# Altium PCB W5500_V1.PcbDoc
Units mm, origin at the board's own origin, x right, y up, seen from the top; angles counter-clockwise.
Board outline 70 x 50 mm, 2 copper layers (Top Layer, Bottom Layer), stack 1.536 mm thick; 73 components, 52 nets, 281 pads, 175 vias.
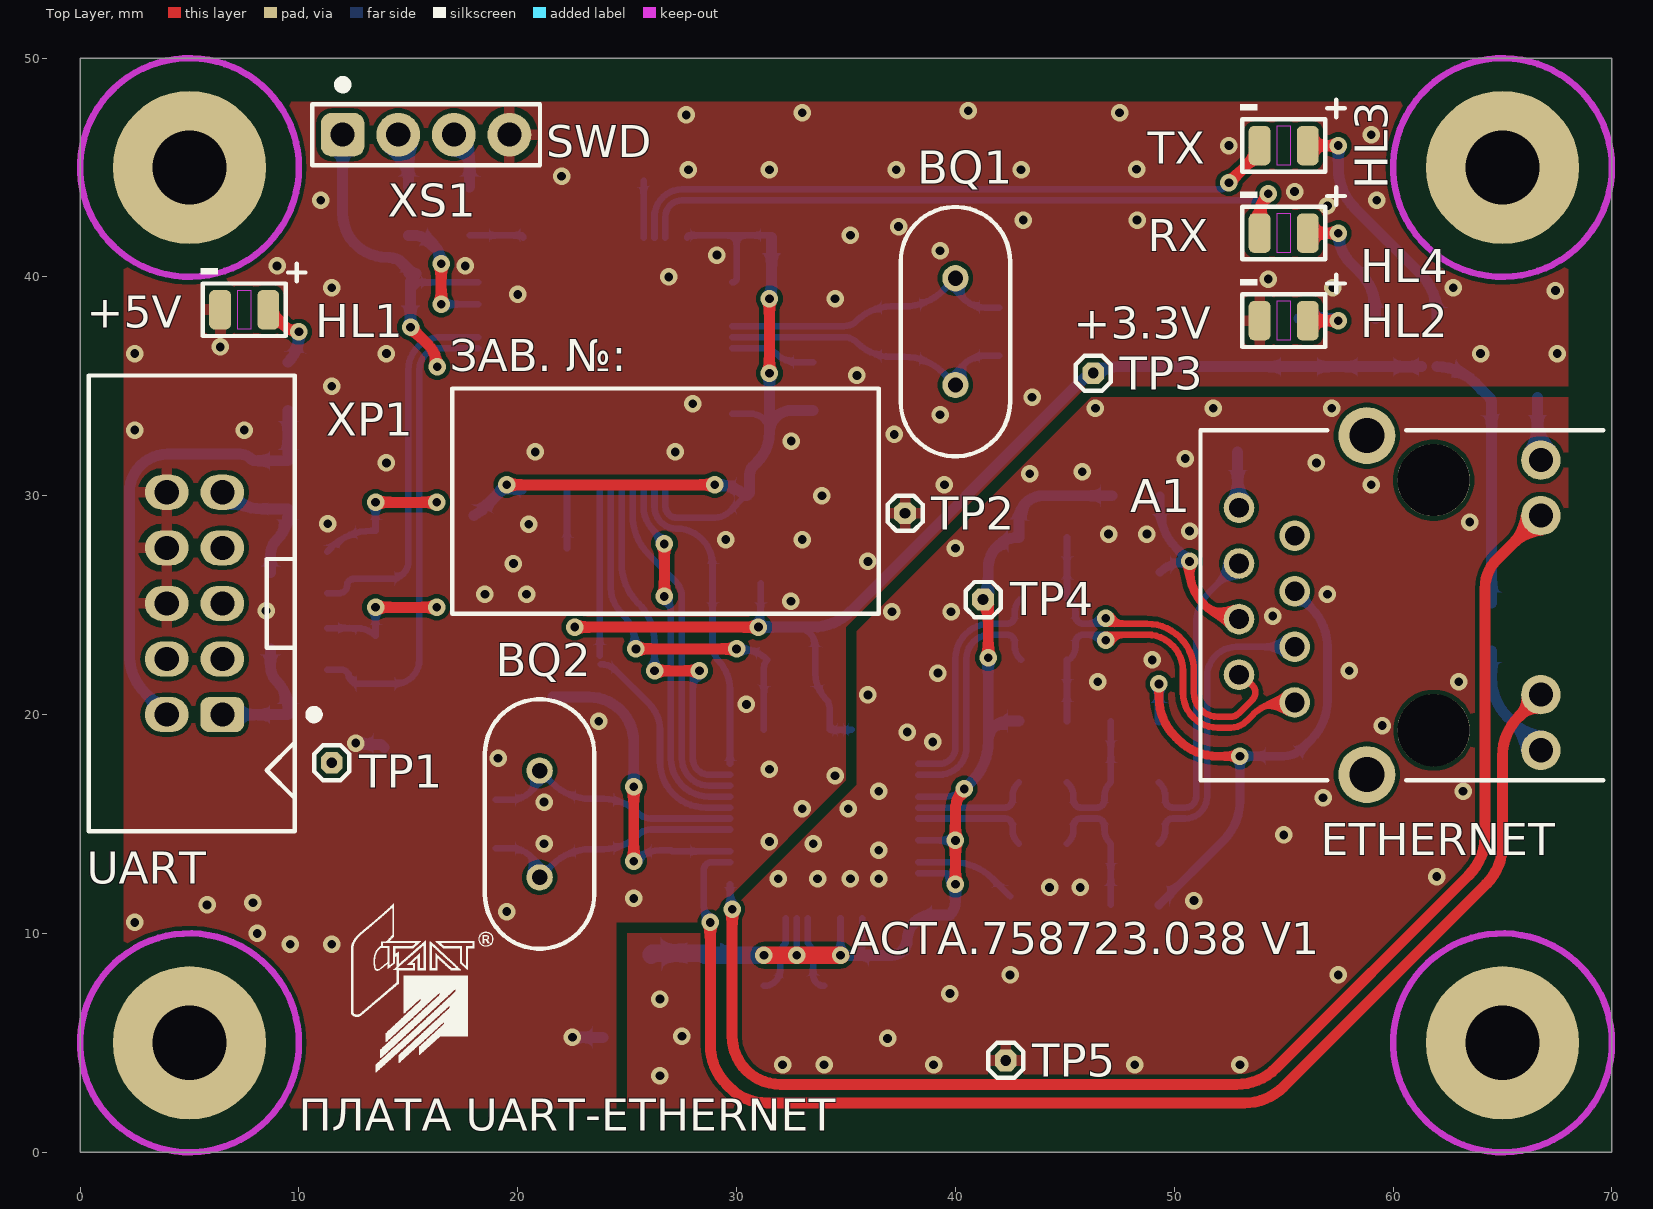
[diagram p0: Top Layer view]
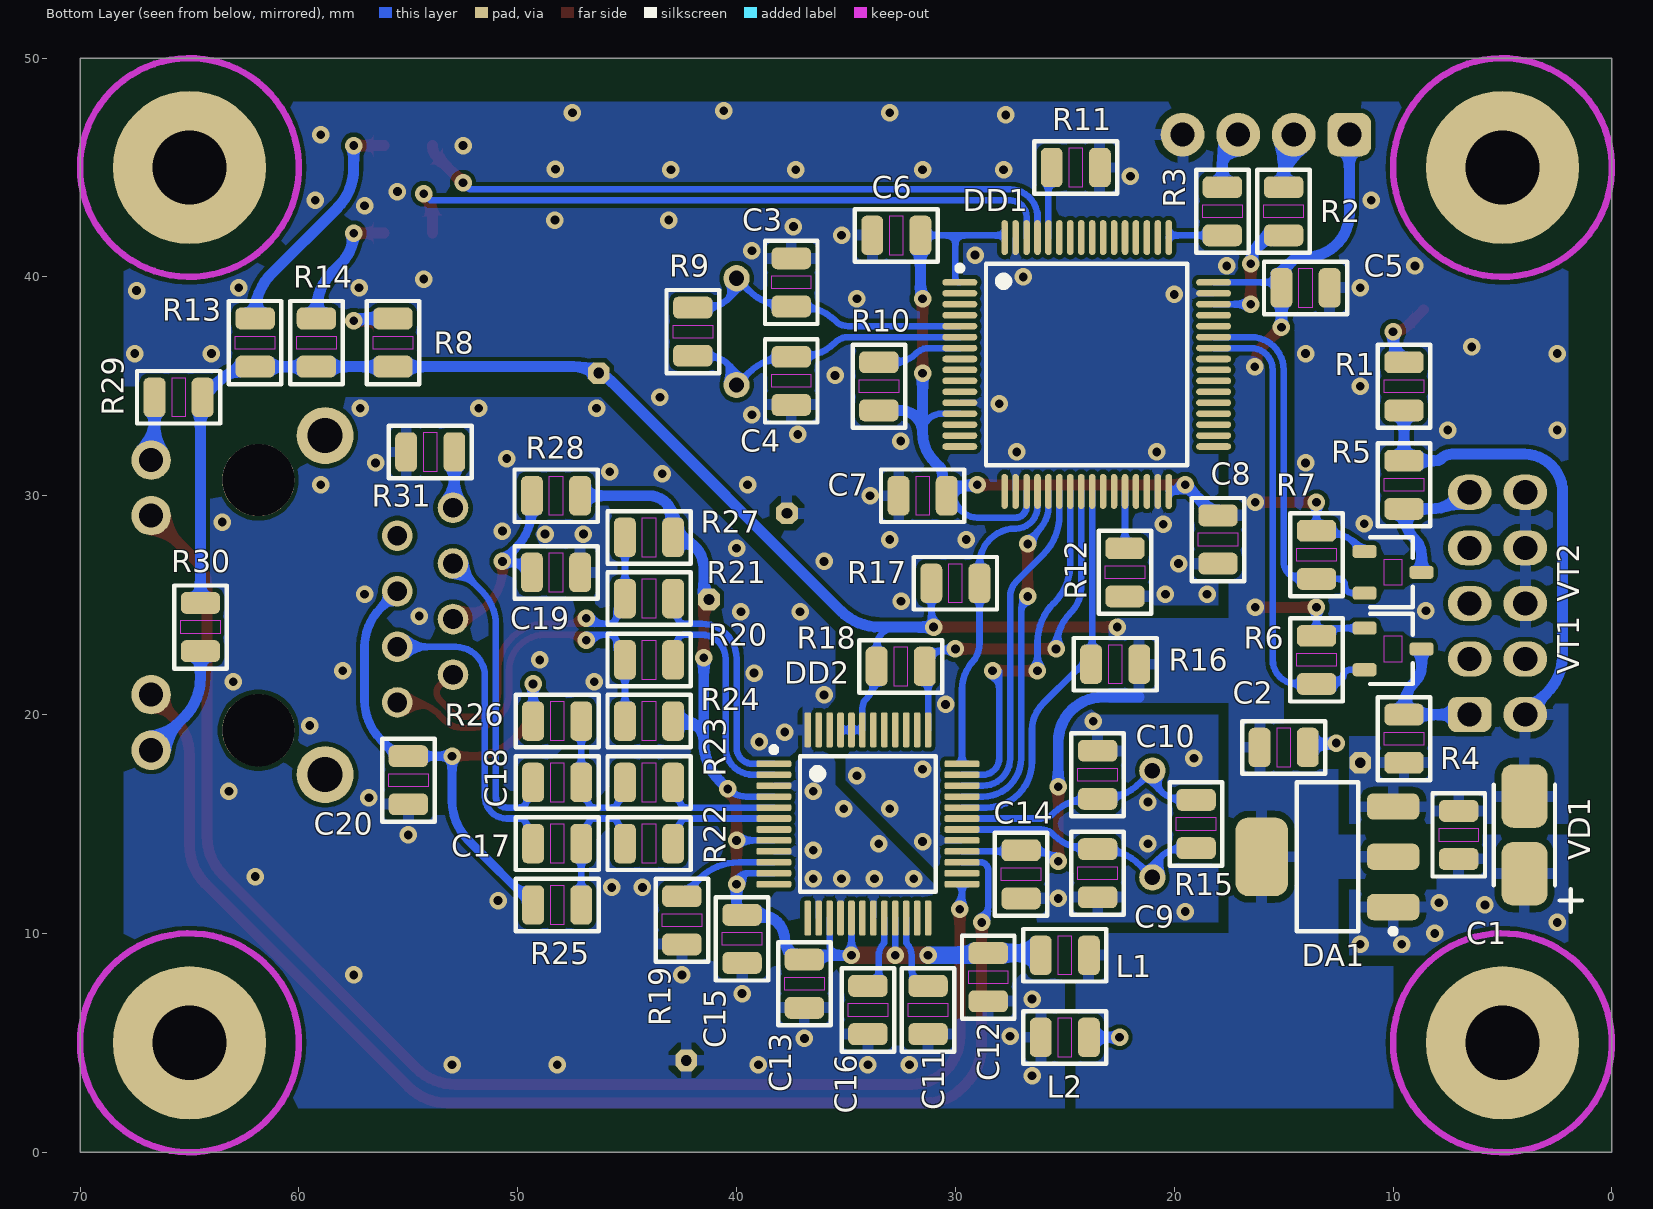
[diagram p1: Bottom Layer view, seen from below]

## Layer stack, top to bottom
Top Solder: solder mask 0.01, Solder Resist, Dk 3.5
Top Layer: signal copper 0.018
Dielectric 1: core 1.5, FR4 Tg135, Dk 4.5
Bottom Layer: signal copper 0.018
Bottom Solder: solder mask 0.01, Solder Resist, Dk 3.5

## Board outline
0,0 0,50 70,50 70,0

## Design rules (kind name [scope] priority, off if disabled: settings)
Clearance [All] p1: gap=0.2 ignorepadtopadclearanceinfootprint=FALSE
ComponentClearance [All] p1: gap=0.1 collisioncheckmode=3 verticalgap=0.1 showdistances=FALSE
DiffPairsRouting [All] p1: maxlimit=1 minlimit=0.2 mostfreqgap=0.2 toplayer_minwidth=0.2 toplayer_maxwidth=1 toplayer_prefwidth=0.2 bottomlayer_minwidth=0.2 bottomlayer_maxwidth=1 bottomlayer_prefwidth=0.2 maxuncoupledlength=12.7
Height [All] p1: minheight=0 maxheight=50 prefheight=15
HoleSize [All] p1: absolutevalues=TRUE maxlimit=3.4 minlimit=0.4 maxpercent=80.000 minpercent=20.000
HoleToHoleClearance [All] p1: gap=0.3 allowstackedmicrovias=TRUE
MinimumSolderMaskSliver [All] p1: minsoldermaskwidth=0.1
PasteMaskExpansion [All] p1: expansion=0.05
PlaneConnect [All] p1: planeconnectstyle=Relief reliefexpansion=0.3 reliefentries=4 reliefconductorwidth=0.3 reliefairgap=0.2
PolygonConnect PolygonConnect_testpoint [InComponent('TP1')] p1: connectstyle=Direct reliefconductorwidth=0.254 reliefentries=4 polygonreliefangle="90 Angle" airgapwidth=0.254
PolygonConnect PolygonConnect_via [isVia] p2: connectstyle=Direct reliefconductorwidth=0.254 reliefentries=4 polygonreliefangle="90 Angle" airgapwidth=0.254
PolygonConnect [All] p3: connectstyle=Relief reliefconductorwidth=0.5 reliefentries=4 polygonreliefangle="90 Angle" airgapwidth=0.3
RoutingCorners [All] p1: cornerstyle=Round minsetback=0.5 maxsetback=2.5
RoutingVias [All] p1: holewidth=0.4 width=0.8 viastyle="Through Hole" minholewidth=0.4 minwidth=0.8 maxholewidth=0.5 maxwidth=1
SilkToSilkClearance [All] p1: silktosilkclearance=0.1
SilkToSolderMaskClearance [IsPad] p1: minsilkscreentomaskgap=0.1 clearancetoexposedcopper=TRUE
SolderMaskExpansion SolderMaskExpansion_via [isVia] p1: expansion=-0.6 istentingtop=FALSE
SolderMaskExpansion [All] p2: expansion=0.1 istentingtop=FALSE
Width [All] p1: maxlimit=5 minlimit=0.2 preferedwidth=0.5
19 further rules are at their usual default settings.

## Classes and differential pairs
net class ETHERNET: RDI_N RDI_P RX_N RX_P TD_N TD_P TX_N TX_P
differential pair TX: +TX_P -TX_N
differential pair TD: +TD_P -TD_N
differential pair RX: +RX_P -RX_N
differential pair RDI: +RDI_P -RDI_N

## Components (designator, comment, footprint, x,y, rotation, side; value= is the part's Value field where it differs from the comment)
A1 "HR911105A" HR911105A 55.5,25 r180 top locked
BQ1 "HT-49S_Rated" HT-49S 40,37.5 r270 top value=14.7456MHz
BQ2 "HT-49S_Rated" HT-49S 21,15 r90 top value=25MHz
C1 "CAP0805_Rated" CAP0805 7,14.5 r270 bottom value=4.7uF
C2 "CAP0805_Rated" CAP0805 15,18.5 r180 bottom value=4.7uF
C3 "CAP0805_Rated" CAP0805 37.5,39.75 r270 bottom value=18pF
C4 "CAP0805_Rated" CAP0805 37.5,35.25 r90 bottom value=18pF
C5 "CAP0805_Rated" CAP0805 14,39.5 r180 bottom value=0.1uF
C6 "CAP0805_Rated" CAP0805 32.7,41.9 r0 bottom value=0.1uF
C7 "CAP0805_Rated" CAP0805 31.5,30 r0 bottom value=0.1uF
C8 "CAP0805_Rated" CAP0805 18,28 r270 bottom value=0.1uF
C9 "CAP0805_Rated" CAP0805 23.5,12.75 r90 bottom value=18pF
C10 "CAP0805_Rated" CAP0805 23.5,17.25 r270 bottom value=18pF
C11 "CAP0805_Rated" CAP0805 31.25,6.5 r270 bottom value=0.01uF
C12 "CAP0805_Rated" CAP0805 28.5,8 r270 bottom value=0.1uF
C13 "CAP0805_Rated" CAP0805 36.9,7.7 r270 bottom value=0.1uF
C14 "CAP0805_Rated" CAP0805 27,12.7 r270 bottom value=0.1uF
C15 "CAP0805_Rated" CAP0805 39.75,9.75 r270 bottom value=0.1uF
C16 "CAP0805_Rated" CAP0805 34,6.5 r270 bottom value=4.7uF
C17 "CAP0805_Rated" CAP0805 48.2,14.1 r0 bottom value=6800pF
C18 "CAP0805_Rated" CAP0805 48.2,16.9 r0 bottom value=6800pF
C19 "CAP0805_Rated" CAP0805 48.25,26.5 r180 bottom value=0.022uF
C20 "CAP0805_Rated" CAP0805 55,17 r270 bottom value=0.01uF
DA1 "AMS1117-3.3" SOT-223 13,13.5 r0 bottom
DD1 "STM32F103RB" LQFP-64 24,36 r180 bottom
DD2 "W5500" LQFP-48 34,15 r180 bottom
HL1 "KPT-2012SGC" KPT-2012 7.5,38.5 r0 top
HL2 "KPT-2012SGC" KPT-2012 55,38 r0 top
HL3 "KPT-2012SGC" KPT-2012 55,46 r0 top
HL4 "KPT-2012SGC" KPT-2012 55,42 r0 top
L1 "BLM21BD121SN1D" IND0805 25,9 r0 bottom value="120 Ohm"
L2 "BLM21BD121SN1D" IND0805 25,5.25 r0 bottom value="120 Ohm"
R1 "RES0805_Rated" RES0805 9.5,35 r270 bottom value=3k
R2 "RES0805_Rated" RES0805 15,43 r270 bottom value=33
R3 "RES0805_Rated" RES0805 17.8,43 r270 bottom value=33
R4 "RES0805_Rated" RES0805 9.5,18.9 r270 bottom value=10k
R5 "RES0805_Rated" RES0805 9.5,30.5 r90 bottom value=10k
R6 "RES0805_Rated" RES0805 13.5,22.5 r90 bottom value=10k
R7 "RES0805_Rated" RES0805 13.5,27.3 r90 bottom value=10k
R8 "RES0805_Rated" RES0805 55.7,37 r270 bottom value=1k
R9 "RES0805_Rated" RES0805 42,37.5 r90 bottom value=1M
R10 "RES0805_Rated" RES0805 33.5,35 r90 bottom value=10k
R11 "RES0805_Rated" RES0805 24.5,45 r0 bottom value=10k
R12 "RES0805_Rated" RES0805 22.25,26.5 r90 bottom value=10k
R13 "RES0805_Rated" RES0805 62,37 r270 bottom value=1k
R14 "RES0805_Rated" RES0805 59.2,37 r270 bottom value=1k
R15 "RES0805_Rated" RES0805 19,15 r270 bottom value=1M
R16 "RES0805_Rated" RES0805 22.7,22.3 r180 bottom value=10k
R17 "RES0805_Rated" RES0805 30,26 r0 bottom value=10k
R18 "RES0805_Rated" RES0805 32.5,22.2 r0 bottom value=10k
R19 "RES0805_Rated" RES0805 42.5,10.6 r90 bottom value="11.4k 1%"
R20 "RES0805_Rated" RES0805 44,22.5 r0 bottom value=33
R21 "RES0805_Rated" RES0805 44,25.3 r0 bottom value=33
R22 "RES0805_Rated" RES0805 44,14.1 r0 bottom value=33
R23 "RES0805_Rated" RES0805 44,16.9 r0 bottom value=33
R24 "RES0805_Rated" RES0805 44,19.7 r180 bottom value="49.9 1%"
R25 "RES0805_Rated" RES0805 48.2,11.3 r180 bottom value="49.9 1%"
R26 "RES0805_Rated" RES0805 48.2,19.7 r0 bottom value="49.9 1%"
R27 "RES0805_Rated" RES0805 44,28.1 r180 bottom value="49.9 1%"
R28 "RES0805_Rated" RES0805 48.25,30 r180 bottom value="10 1%"
R29 "RES0805_Rated" RES0805 65.5,34.5 r180 bottom value=2.2k
R30 "RES0805_Rated" RES0805 64.5,24 r90 bottom value=2.2k
R31 "RES0805_Rated" RES0805 54,32 r180 bottom value=0
TP1 "TestPad" PAD-TH-OCT1x1-0.5 11.5,17.8 r0 top
TP2 "TestPad" PAD-TH-OCT1x1-0.5 37.7,29.2 r90 top
TP3 "TestPad" PAD-TH-OCT1x1-0.5 46.3,35.6 r90 top
TP4 "TestPad" PAD-TH-OCT1x1-0.5 41.268,25.256 r90 top
TP5 "TestPad" PAD-TH-OCT1x1-0.5 42.3,4.2 r90 top
VD1 "SMAJ5.0A" "SMA (DO-214AC)" 4,14.5 r270 bottom
VT1 "BSS138" SOT-23 10,23 r180 bottom
VT2 "BSS138" SOT-23 10,26.5 r180 bottom
XP1 "IDC-10MS" "IDC-10MS pad1.6x2.0" 6.5,20 r90 top
XS1 "PBS-4" PBS-4 12,46.5 r0 top

## Footprints (in the part's own frame and the unit in brackets; to place one, negate y for a bottom-side part, rotate by r counter-clockwise, add the part's x,y. Pads: shape width x height; smd on the part's side, far side on the other; paste and mask are expansions set on the pad)
CAP0805 [mm] "Chip Capacitor, 2-Leads, Body 2,00x1,25mm, IPC Low Density"
  rrect50% 1x1.8 smd: 1(-1.1,0) 2(1.1,0)
  Top Layer keep-out region: -0.3,0.9 0.3,0.9 0.3,-0.9 -0.3,-0.9
  silkscreen extent -1.9,-1.2 1.9,1.2, body extent -1,-0.62 1,0.63, height 1
HR911105A [mm] "Ethernet Connector 10/100 1x1 Tab Down RJ45 w/mag G/Y LED"
  round 3.3 hole 3.3: 0(-6.35,5.715) 0(-6.35,-5.715)
  round 2.6 hole 1.6: 0(-3.3,7.745) 0(-3.3,-7.745)
  round 1.4 hole 0.9: 1(0,4.445) 2(2.54,3.175) 3(0,1.905) 4(2.54,0.635) 5(0,-0.635) 6(2.54,-1.905) 7(0,-3.175) 8(2.54,-4.445)
  round 1.8 hole 1.1: 9(-11.25,6.63) 10(-11.25,4.09) 11(-11.25,-4.09) 12(-11.25,-6.63)
  silkscreen extent -14.1,-8 4.3,8, body extent -17.27,-7.94 4.13,7.94, height 13.7
HT-49S [mm] "TH Crystal"
  round 1.2 hole 0.7: 1(-2.44,0) 2(2.44,0)
  silkscreen extent -5.7,-2.5 5.7,2.5, body extent -5.48,-2.25 5.5,2.25, height 3.7
"IDC-10MS pad1.6x2.0" [mm] "Box Header Pitch 2.54mm"
  rrect50% 1.6x2 hole 1.1: 1(0,0)
  oval 1.6x2 hole 1.1: 2(0,2.54) 3(2.54,0) 4(2.54,2.54) 5(5.08,0) 6(5.08,2.54) 7(7.62,0) 8(7.62,2.54) 9(10.16,0) 10(10.16,2.54)
  silkscreen extent -5.33,-4.39 15.49,6.1, body extent -5.07,-3.01 15.23,5.84, height 9.33
IND0805 [mm] "Chip Inductor, 2-Leads, Body 2,00x1,25mm, IPC Low Density"
  rrect50% 1x1.8 smd: 1(-1.1,0) 2(1.1,0)
  Top Layer keep-out region: -0.3,0.9 0.3,0.9 0.3,-0.9 -0.3,-0.9
  silkscreen extent -1.9,-1.2 1.9,1.2, body extent -1,-0.62 1,0.63, height 0.85
KPT-2012 [mm] "2.0x1.2mm SMD LED"
  rrect50% 1x1.8 smd: A(1.1,0) K(-1.1,0)
  Top Layer keep-out region: -0.3,0.9 0.3,0.9 0.3,-0.9 -0.3,-0.9
  silkscreen extent -2,-1.2 2.8,2.1, body extent -1,-0.63 1,0.63, height 0.7
LQFP-48 [mm] "LQFP, 48-Leads, Body 7,00x7,00mm, Pitch 0,50mm, IPC Low Density"
  rrect50% 1.6x0.3 smd: 1(-4.3,2.75) 2(-4.3,2.25) 3(-4.3,1.75) 4(-4.3,1.25) 5(-4.3,0.75) 6(-4.3,0.25) 7(-4.3,-0.25) 8(-4.3,-0.75) 9(-4.3,-1.25) 10(-4.3,-1.75) 11(-4.3,-2.25) 12(-4.3,-2.75) 25(4.3,-2.75) 26(4.3,-2.25) 27(4.3,-1.75) 28(4.3,-1.25) 29(4.3,-0.75) 30(4.3,-0.25) 31(4.3,0.25) 32(4.3,0.75) 33(4.3,1.25) 34(4.3,1.75) 35(4.3,2.25) 36(4.3,2.75)
  rrect50% 0.3x1.6 smd: 13(-2.75,-4.3) 14(-2.25,-4.3) 15(-1.75,-4.3) 16(-1.25,-4.3) 17(-0.75,-4.3) 18(-0.25,-4.3) 19(0.25,-4.3) 20(0.75,-4.3) 21(1.25,-4.3) 22(1.75,-4.3) 23(2.25,-4.3) 24(2.75,-4.3) 37(2.75,4.3) 38(2.25,4.3) 39(1.75,4.3) 40(1.25,4.3) 41(0.75,4.3) 42(0.25,4.3) 43(-0.25,4.3) 44(-0.75,4.3) 45(-1.25,4.3) 46(-1.75,4.3) 47(-2.25,4.3) 48(-2.75,4.3)
  silkscreen extent -4.43,-3.1 3.1,3.52, body extent -4.57,-4.57 4.57,4.57, height 1.62
LQFP-64 [mm] "LQFP, 64-Leads, Body 10,00x10,00mm, Pitch 0,50mm, IPC Low Density"
  oval 1.6x0.3 smd: 1(-5.8,3.75) 2(-5.8,3.25) 3(-5.8,2.75) 4(-5.8,2.25) 5(-5.8,1.75) 6(-5.8,1.25) 7(-5.8,0.75) 8(-5.8,0.25) 9(-5.8,-0.25) 10(-5.8,-0.75) 11(-5.8,-1.25) 12(-5.8,-1.75) 13(-5.8,-2.25) 14(-5.8,-2.75) 15(-5.8,-3.25) 16(-5.8,-3.75) 33(5.8,-3.75) 34(5.8,-3.25) 35(5.8,-2.75) 36(5.8,-2.25) 37(5.8,-1.75) 38(5.8,-1.25) 39(5.8,-0.75) 40(5.8,-0.25) 41(5.8,0.25) 42(5.8,0.75) 43(5.8,1.25) 44(5.8,1.75) 45(5.8,2.25) 46(5.8,2.75) 47(5.8,3.25) 48(5.8,3.75)
  oval 0.3x1.6 smd: 17(-3.75,-5.8) 18(-3.25,-5.8) 19(-2.75,-5.8) 20(-2.25,-5.8) 21(-1.75,-5.8) 22(-1.25,-5.8) 23(-0.75,-5.8) 24(-0.25,-5.8) 25(0.25,-5.8) 26(0.75,-5.8) 27(1.25,-5.8) 28(1.75,-5.8) 29(2.25,-5.8) 30(2.75,-5.8) 31(3.25,-5.8) 32(3.75,-5.8) 49(3.75,5.8) 50(3.25,5.8) 51(2.75,5.8) 52(2.25,5.8) 53(1.75,5.8) 54(1.25,5.8) 55(0.75,5.8) 56(0.25,5.8) 57(-0.25,5.8) 58(-0.75,5.8) 59(-1.25,5.8) 60(-1.75,5.8) 61(-2.25,5.8) 62(-2.75,5.8) 63(-3.25,5.8) 64(-3.75,5.8)
  silkscreen extent -5.93,-4.6 4.6,4.6, body extent -6.07,-6.07 6.07,6.07, height 1.62
PAD-TH-OCT1x1-0.5 [mm] "PAD TH 1x1mm Octogonal Hole 0.5mm"
  oct 1x1 hole 0.5: 1(0,0)
  silkscreen extent -0.8,-0.8 0.8,0.8
PBS-4 [mm] "Female Header Pitch 2.54mm"
  rrect50% 2x2 hole 1.1: 1(0,0)
  round 2 hole 1.1: 2(2.54,0) 3(5.08,0) 4(7.62,0)
  silkscreen extent -1.4,-1.4 9.02,2.49, body extent -1.27,-1.27 8.89,1.27, height 8.4
RES0805 [mm] "Chip Resistor, 2-Leads, Body 2,00x1,25mm, IPC Low Density"
  rrect50% 1x1.8 smd: 1(-1.1,0) 2(1.1,0)
  Top Layer keep-out region: -0.3,0.9 0.3,0.9 0.3,-0.9 -0.3,-0.9
  silkscreen extent -1.9,-1.2 1.9,1.2, body extent -1,-0.62 1,0.63, height 0.47
"SMA (DO-214AC)" [mm] "Molded Diode, 2-Leads, Body 4,30x2,40mm, IPC Low Density"
  rrect50% 2.9x2.1 smd: A(1.778,0) K(-1.778,0)
  silkscreen extent -2.3,-1.4 3.5,2.63, body extent -2.79,-1.47 2.81,1.48, height 2.9
SOT-23 [mm] "3-Leads, Body 2,90x2,45mm, Pitch 0,95mm, IPC Low Density"
  rrect50% 1.1x0.6 smd: 1(-1.3,0.95) 2(-1.3,-0.95) 3(1.3,0)
  Top Layer keep-out region: -0.4,0.6 0.4,0.6 0.4,-0.6 -0.4,-0.6
  silkscreen extent -1.05,-1.6 0.9,1.6, body extent -1.3,-1.48 1.3,1.52, height 1.1
SOT-223 [mm] "SOT223, 4-Leads, Body 6,50x7,00mm (avg), Pitch 2,30mm, IPC Low Density"
  rrect50% 2.4x1.2 smd: 1(-3,2.3) 2(-3,0) 3(-3,-2.3)
  rrect50% 2.4x3.6 smd: 2(3,0)
  silkscreen extent -3.12,-3.4 1.4,3.52, body extent -3.48,-3.25 3.48,3.25, height 1.7

## Part data
A1: "Ethernet Connector 10/100 1x1 Tab Down RJ45 w/mag G/Y LED"
C1 C2 C3 C4 C5 C6 C7 C8 C9 C10 C11 C12 C13 C14 C15 C16 C17 C18 C19 C20: Case=0805, ComponentLink1Description=DatasheetLink
DA1: "Fixed Voltage 3.3V 1A Low Dropout Voltage Regulator"
DD1: "ARM Cortex-M3 MCU"
DD2: "Ethernet ICs 3in1 Enet Controller TCP/IP +MAC+PHY"
HL1 HL2 HL3 HL4: "2.0x1.2mm SMD LED Super Bright Green"
L1 L2: "Ferrite Bead 0805 120 Ohm", Case=0805, DCResistance="0.25 Ohm", Manufacturer=Murata, RatedCurrent=200mA, Tolerance=25%, 1Carticle=42076, 1Ccode=М00053470, 1CfullName="BLM21BD121SN1D MUR", 1Cgroup=01010901, 1Cname="BLM21BD121SN1D MUR", ComponentLink1Description=DatasheetLink, Name="Фильтр BLM21BD121SN1D", PartNumber=BLM21BD121SN1D
R1 R2 R3 R4 R5 R6 R7 R8 R9 R10 R11 R12 R13 R14 R15 R16 R17 R18 R19 R20 R21 R22 R23 R24 R25 R26 R27 R28 R29 R30 R31: Tolerance=5%
TP1 TP2 TP3 TP4 TP5: "TestPoint on PCB", Label="\"Label\""
VD1: "5Vr 400W 43.5A UniDirectional TVS", Vbr=6.4V
VT1 VT2: "Small Signal N-Channel MOSFET 50V 220mA", Case=SOT-23, 1Carticle=30894, 1Ccode=М00041810, 1CfullName="Транзистор BSS138", 1Cgroup=01010104, 1Cname="Транзистор BSS138", ChannelPolarity=N-Channel, ComponentLink1Description=DatasheetLink, Name="Транзистор BSS138", PartNumber=BSS138
XP1: "Box Header Pitch 2.54mm", Circuit1=RX, Circuit2=+5V, Circuit3=NC, Circuit4=NC, Circuit5=TXE, Circuit6=GND, Circuit7=MX, Circuit8=GND, Circuit9=TX, Circuit10=GND, Label="\"Label\""
XS1: "Female Header Pitch 2.54mm", Circuit1=+3.3V, Circuit2=SWDIO, Circuit3=SWCLK, Circuit4=GND, ComponentLink1Description=DatasheetLink, Label="\"SWD\""
BQ1 BQ2: ComponentLink1Description=DatasheetLink

## Free pads (board coordinates)
  round 7 hole 3.4: 0(5,5) 0(5,45) 0(65,5) 0(65,45)

## Via types
v1: diameter 0.8, hole 0.4, Top Layer to Bottom Layer, 175 vias

## Nets (pads, with @x,y where several pads share a name; then routed paths per layer and width w, separated by ;. In a path a pad name is that pad's centre, name@x,y a point inside that pad or via, vN(x,y) a via of type N, cw(c..) or ccw(c..) an arc to the next point about the centre after c; other vN are vias at no path point)
1.2V: C11.1 DD2.22 | length 3.6
  Bottom Layer w0.3: C11.1 ccw(c31.25,8.35) 32,8.35 32,9 cw(c32.75,9) 32.22,9.53 ccw(c31.95,9.662) 32.25,9.661 DD2.22
3.3V: C2.1 C5.1 C6.1 C7.1 C8.1 C14.1 DA1.2 DD1.1 DD1.13 DD1.19 DD1.32 DD1.48 DD1.64 DD2.28 DD2.43 DD2.44 DD2.45 L1.1 R6.2 R7.2 R8.2 R10.1 R13.2 R14.2 R16.2 R17.2 R18.2 R29.2 R30.2 TP3.1 VT1.1 VT2.1 XS1.1 | length 150.8
  Top Layer w0.5: v1(13.5,24.9) v1(16.3,24.9) ; v1(13.5,29.7) v1(16.3,29.7) ; v1(15.1,37.7) 15.919,36.881 cw(c14.938,35.9) 16.268,36.295 cw(c14.938,35.9) v1(16.325,35.9) ; v1(19.5,30.5) v1(29,30.5) ; v1(22.6,24) v1(31,24) ; v1(25.3,13.3) v1(25.3,16.7) ; v1(31.5,35.6) v1(31.5,39)
  Bottom Layer w0.3: VT1.1 12.655,23.95 cw(c12.655,22.755) R6.2 v1(13.5,24.9) ; VT2.1 11.506,27.656 cw(c13.302,25.86) 13.302,28.4 R7.2 v1(13.5,29.7) ; C5.1@15.35,39.75 DD1.48 ; v1@19.483,30.2 DD1.32 ; v1(25.3,13.3) cw(c26.507,12.093) 26.507,13.8 C14.1 ccw(c27.121,13.921) 27.121,13.75 DD2.28 ; DD1.19 26.75,29.5 ccw(c27.25,29.5) 27.25,29 29,29 ccw(c29,29.966) 29.683,29.283 C7.1 ; DD1.64 cw(c27.85,41.8) 27.85,41.9 30,41.9 ; DD1.13 30.628,33.75 cw(c30.628,32.878) 31.5,32.878 ; DD1.1 ccw(c29.8,39.95) 30,39.95 30,41.9 ; R17.2 v1@31.1,24.241 ; C6.1@31.6,41.8 ccw(c31.5,41.8) 31.5,41.9 30,41.9 ; 32.7,24 cw(c32.7,23.1) 33.6,23.1 R18.2 33.6,21.863 ccw(c35.202,21.863) 33.888,20.947 ccw(c35.202,21.863) 34.069,20.731 cw(c33.632,20.294) 34.25,20.294 DD2.43 DD2.44 DD2.45 ; v1@31.1,24.241 cw(c30.759,24.241) v1(31,24) ccw(c31,24.1) 31.1,24.1 v1@31.1,24.241
  Bottom Layer w0.5: XS1.1 12,42.9 ccw(c14,42.9) 14,40.9 cw(c14,39.8) 14.298,40.859 ccw(c14.431,41.341) 14.36,40.846 cw(c14.3,40.4) 14.62,40.716 ccw(c14.974,41.069) 14.669,40.673 cw(c14,39.8) 15.041,40.154 ccw(c15.467,40.302) 15.043,40.15 15.35,40.15 15.1,39.8 C5.1 ; v1(15.1,37.7) C5.1 ; C5.1@15.35,39.75 C5.1 ; C8.1 18.393,29.35 18.393,29.393 v1(19.5,30.5) ; 21.6,20.8 23.251,20.8 cw(c23.251,18.751) 24.7,20.2 cw(c23.251,18.751) 25.3,18.751 v1(25.3,16.7) ; v1(29,30.5) 29.193,30.5 cw(c29.193,28.793) C7.1 ccw(c30.4,30.2) 30.6,30.2 30.6,30.993 cw(c31.1,30.993) 30.746,31.346 30.95,31.55 ccw(c29.622,32.878) 31.5,32.878 ; v1(31,24) 32.7,24 33.448,24 ccw(c33.448,26.54) 35.244,24.744 45.656,35.156 cw(c47.452,33.36) 47.452,35.9 R8.2 R13.2@61.3,35.9 ; v1(31.5,35.6) 31.5,34.626 31.5,32.878 ; v1(31.5,39) ccw(c31.5,39.1) 31.6,39.1 C6.1@31.6,41.8 ; R10.1 32.522,33.9 ccw(c32.522,32.878) 31.5,32.878 ; R13.2 cw(c62,33.486) 63.707,35.193 R29.2 cw(c64.159,34.259) 64.5,34.259 R30.2
3.3VA: C12.1 C13.1 C15.1 DD2.4 DD2.8 DD2.11 DD2.15 DD2.17 DD2.21 L1.2 R24.2 R27.2 R28.2 TP4.1 | length 52
  Top Layer w0.5: v1(40,12.25) v1(40,14.25) 40,15.634 cw(c41.366,15.634) v1(40.4,16.6) ; v1(41.5,22.6) TP4.1@41.5,25
  Top Layer w0.8: v1(31.25,9) v1(32.75,9) v1(34.75,9)
  Bottom Layer w0.3: v1(32.75,9) DD2.21 ; v1(34.75,9) DD2.17 ; 35.3,9 ccw(c35.3,9.45) 35.75,9.45 DD2.15 ; DD2.11 39.5,12.75 cw(c39.5,12.25) v1(40,12.25) ; DD2.8 v1(40,14.25) ; DD2.4 39.555,16.25 ccw(c39.555,17.445) 40.001,16.336 ccw(c39.555,17.445) v1(40.4,16.6)
  Bottom Layer w0.5: v1(34.75,9) 35.3,9 37.1,9 ccw(c37.1,9.7) 37.8,9.7 cw(c38.95,9.7) 38.95,10.85 C15.1 ccw(c39.146,11.454) 40,11.454 v1(40,12.25) ; v1(40.4,16.6) 40.756,16.956 ccw(c38.96,18.752) 41.5,18.752 41.5,18.8 ; v1(41.5,22.6) 41.5,18.8 ; TP4.1@41.5,25.228 41.5,26.7 cw(c42.9,26.7) R27.2 42.9,28.9 cw(c44,28.9) 44,30 R28.2 ; R24.2 42.4,19.7 ccw(c42.4,18.8) 41.5,18.8
  Bottom Layer w0.8: L1.2 cw(c26.2,9) 26.2,9.1 C12.1 ccw(c28.6,9.1) 28.6,9 v1(31.25,9)
5V: C1.1 DA1.3 R1.2 R4.2 R5.2 TP1.1 VD1.K XP1.2 | length 21.4
  Bottom Layer w0.5: XP1.2 2.994,20.966 cw(c4.79,22.762) 2.25,22.762 2.25,30.15 cw(c4,30.15) 4,31.9 7.317,31.9 cw(c7.317,31.217) 7.8,31.7 ccw(c8.041,31.941) 8.041,31.6 R5.2 R1.2
ACTLED: A1.10 DD2.27 | length 59.9
  Top Layer w0.5: v1(28.8,10.5) 28.8,4.899 ccw(c31.34,4.899) 29.544,3.103 29.92,2.727 ccw(c31.402,4.79) 31.402,2.25 53.198,2.25 ccw(c53.198,4.79) 54.994,2.994 64.256,12.256 ccw(c62.46,14.052) 65,14.052 65,18.108 cw(c67.54,18.108) 65.744,19.904 A1.10
  Bottom Layer w0.3: v1(28.8,10.5) cw(c29.524,11.224) 28.5,11.224 28.5,12.9 cw(c28.85,12.9) 28.85,13.25 DD2.27
BOOT0: DD1.60 R11.2 | length 2.6
  Bottom Layer w0.3: DD1.60 R11.2@25.75,44.4
BOOT1: DD1.28 R12.2 | length 2.6
  Bottom Layer w0.3: R12.2 DD1.28
EXRES: DD2.10 R19.2 | length 4.7
  Bottom Layer w0.3: DD2.10 39.898,13.25 cw(c39.898,10.71) 41.694,12.506 R19.2
GND: C1.2 C2.2 C3.1 C4.1 C5.2 C6.2 C7.2 C8.2 C9.1 C10.1 C14.2 DA1.1 DD1.12 DD1.18 DD1.31 DD1.47 DD1.63 DD2.29 HL1.K HL2.K L2.1 R11.1 R12.1 TP2.1 VD1.A XP1.6 XP1.8 XP1.10 XS1.4 | length 2.8
  Bottom Layer w0.5: v1(12.6,18.7) 12.657,18.643 13.757,18.643 C2.2 ; v1(22.5,5.25) L2.1
  other v1: 9.6,9.5 11.5,9.5 8.1,10 2.5,10.5 19.5,11 5.8,11.3 7.9,11.4 25.3,11.6 21.2,14.1 31.5,14.2 33,15.7 21.2,16 34.5,17.2 31.5,17.5 19.1,18 23.7,19.7 30.452,20.461 8.5,24.75 32.486,25.176 18.5,25.5 20.4,25.5 19.8,26.9 36,27 29.5,28 33,28 20.5,28.7 11.316,28.722 33.9,30 39.5,30.5 14,31.5 20.8,32 27.2,32 32.5,32.5 37.2,32.8 2.5,33 7.5,33 39.3,33.7 28,34.2 43.5,34.5 11.5,35 35.5,35.5 2.5,36.5 14,36.5 64,36.5 67.5,36.5 6.4,36.8 34.5,39 20,39.2 67.417,39.377 11.5,39.5 57.25,39.5 62.75,39.5 54.3,39.9 26.9,40 9,40.5 17.6,40.5 29.1,41 39.3,41.2 35.2,41.9 37.4,42.3 43.1,42.6 48.3,42.6 57,43.25 11,43.5 59.25,43.5 55.5,43.9 22,44.6 27.8,44.9 31.5,44.9 37.3,44.9 43,44.9 48.28,44.921 52.5,46 59,46.5 27.7,47.4 33,47.5 47.5,47.5 40.583,47.597
GNDA: C11.2 C12.2 C13.2 C15.2 C16.2 C19.2 C20.2 DD2.3 DD2.9 DD2.14 DD2.16 DD2.19 DD2.48 L2.2 R19.1 R31.1 TP5.1
  other v1: 26.5,3.5 32.1,4 34,4 39,4 48.2,4 53,4 36.9,5.2 27.5,5.3 26.5,7 39.75,7.25 42.5,8.1 57.5,8.1 50.9,11.5 44.3,12.1 45.7,12.1 31.9,12.5 33.7,12.5 35.2,12.5 36.5,12.5 62,12.6 36.5,13.8 33.5,14.1 55,14.5 35.1,15.7 56.8,16.2 36.5,16.5 63.2,16.5 38.96,18.752 37.8,19.2 59.5,19.5 36,20.9 46.5,21.5 63,21.5 39.2,21.9 58,22 49,22.5 54.5,24.5 37.1,24.7 39.8,24.7 57,25.5 40,27.6 47,28.25 48.75,28.25 50.702,28.386 63.5,28.8 59,30.5 43.4,31 45.8,31.1 56.5,31.5 50.5,31.7 51.777,33.997 46.4,34 57.2,34
LED-RX: DD1.62 HL4.K | length 31
  Top Layer w0.5: HL4.K 53.9,42.834 cw(c55.266,42.834) v1(54.3,43.8)
  Bottom Layer w0.3: DD1.62 26.75,42.75 cw(c27.5,42.75) 27.5,43.5 29.5,43.5 54,43.5 v1(54.3,43.8)
LED-TX: DD1.61 HL3.K | length 30.3
  Top Layer w0.5: v1(52.5,44.3) 53.688,45.488 ccw(c53.176,46) HL3.K
  Bottom Layer w0.3: DD1.61 26.25,42.913 ccw(c25.977,43.037) 26.271,42.981 cw(c27.5,42.75) 27.5,44 27.999,44 ; 28,44 52.2,44 v1(52.5,44.3)
LINKLED: A1.11 DD2.25 | length 63.3
  Top Layer w0.5: v1(29.8,11.1) 29.8,5.3 ccw(c32,5.3) 32,3.1 52.848,3.1 ccw(c52.848,5.64) 54.644,3.844 63.456,12.656 ccw(c61.66,14.452) 64.2,14.452 64.2,25.771 cw(c66.057,25.771) 64.744,27.084 A1.11
  Bottom Layer w0.3: DD2.25 29.7,11.341 ccw(c30.041,11.341) v1(29.8,11.1)
NetA1_8: A1.8 R31.2 | length 2.6
  Bottom Layer w0.5: R31.2 52.9,29.505 A1.8
NetA1_9: A1.9 R30.1 | length 5.4
  Bottom Layer w0.5: R30.1 64.5,21.672 ccw(c67.04,21.672) 65.244,19.876 A1.9
NetA1_12: A1.12 R29.1 | length 3
  Bottom Layer w0.5: R29.1 66.6,31.78 ccw(c66.75,31.78) A1.12
NetC16_1: C16.1 DD2.20 | length 3.4
  Bottom Layer w0.3: DD2.20 33.25,9.75 33.25,9.662 ccw(c33.55,9.662) 33.28,9.53 cw(c32.75,9) 33.5,9 33.5,8.5 33.5,8.1 ccw(c34,8.1) 33.541,7.901 ccw(c34,8.1) 33.801,7.641 ccw(c34,8.1) C16.1
NetHL1_A: HL1.A R1.1 | length 3.3
  Top Layer w0.5: HL1.A 9.317,37.783 ccw(c10,38.466) v1(10,37.5)
  Bottom Layer w0.5: R1.1 ccw(c8.293,37.307) 10,37.307 v1(10,37.5)
NetHL2_A: HL2.A R8.1 | length 3.2
  Top Layer w0.5: HL2.A v1(57.5,38)
  Bottom Layer w0.5: R8.1 57.259,38.1 cw(c57.259,37.759) v1(57.5,38)
NetHL3_A: HL3.A R13.1 | length 10.9
  Top Layer w0.5: HL3.A v1(57.5,46)
  Bottom Layer w0.5: v1(57.5,46) 57.5,44.952 ccw(c60.04,44.952) 58.244,43.156 61.256,40.144 cw(c59.46,38.348) 62,38.348 R13.1
NetHL4_A: HL4.A R14.1 | length 5.8
  Top Layer w0.5: HL4.A v1(57.5,42)
  Bottom Layer w0.5: v1(57.5,42) ccw(c59.431,42) 58.066,40.634 58.456,40.244 cw(c56.66,38.448) 59.2,38.448 R14.1
NetR2_1: R2.1 XS1.2 | length 2.7
  Bottom Layer w0.5: XS1.2 cw(c14.54,46.04) 15,46.04 R2.1
NetR3_1: R3.1 XS1.3 | length 2.7
  Bottom Layer w0.5: XS1.3 17.08,46.213 17.08,46.113 17.118,46.021 ccw(c17.58,46.213) 17.373,45.758 cw(c17.08,45.1) 17.8,45.1 R3.1
NRST: DD1.7 R10.2 | length 3.9
  Bottom Layer w0.3: DD1.7 31.196,36.75 cw(c31.196,35.896) 31.8,36.5 ccw(c32.766,37.466) 32.766,36.1 R10.2
OSCIN: BQ1.1 C3.2 DD1.5 R9.2 | length 13.6
  Bottom Layer w0.3: DD1.5 34.896,37.75 ccw(c34.896,38.604) 35.5,38 cw(c37.069,36.431) 37.069,38.65 C3.2 37.658,38.65 ccw(c37.658,41.19) 39.454,39.394 BQ1.1 ccw(c41.34,39.94) 41.34,38.6 R9.2
OSCOUT: BQ1.2 C4.2 DD1.6 R9.1 | length 13.6
  Bottom Layer w0.3: DD1.6 34.896,37.25 cw(c34.896,36.396) 35.5,37 ccw(c37.069,38.569) 37.069,36.35 C4.2 37.658,36.35 cw(c37.658,33.81) 39.454,35.606 BQ1.2 cw(c41.34,35.06) 41.34,36.4 R9.1
RCT: A1.5 C20.1 R25.1 R26.2 | length 26.8
  Top Layer w0.4: v1(49.3,21.4) 49.3,20.79 ccw(c51.84,20.79) 50.044,18.994 50.194,18.844 ccw(c51.99,20.64) 51.99,18.1 v1(53,18.1)
  Bottom Layer w0.4: R25.1 52.256,14.256 ccw(c50.46,16.052) 53,16.052 v1(53,18.1) C20.1 ccw(c55,19.307) 55.854,18.454 56.256,18.856 ccw(c54.46,20.652) 57,20.652 57,23.083 ccw(c54.46,23.083) 56.256,24.879 A1.5 A1.5@55.5,25.673 ; R26.2 v1(49.3,21.4)
RD_N: C18.1 R23.2 R26.1 | length 6.4
  Bottom Layer w0.3: R23.2 45.155,16.845 cw(c44.593,16.282) 45.388,16.282 45.388,16.097 ccw(c45.735,16.097) 45.49,15.852 ccw(c45.735,16.097) 45.735,15.75 46.465,15.75 ccw(c46.465,16.097) 46.71,15.852 ccw(c46.465,16.097) 46.812,16.097 46.812,16.282 cw(c47.607,16.282) 47.045,16.845 C18.1 R26.1
RD_P: C17.1 R22.2 R25.2 | length 6.4
  Bottom Layer w0.3: R22.2 45.155,14.155 ccw(c44.593,14.718) 45.388,14.718 45.388,14.903 cw(c45.735,14.903) 45.49,15.148 cw(c45.735,14.903) 45.735,15.25 46.465,15.25 cw(c46.465,14.903) 46.71,15.148 cw(c46.465,14.903) 46.812,14.903 46.812,14.718 ccw(c47.607,14.718) 47.045,14.155 C17.1 R25.2
RDI_N: A1.6 C18.2 | length 14.2
  Bottom Layer w0.3: C18.2 49.355,16.845 cw(c48.793,16.282) 49.588,16.282 49.588,16.097 ccw(c49.935,16.097) 49.69,15.852 ccw(c49.935,16.097) 49.935,15.75 50.5,15.75 ccw(c50.5,16.25) 51,16.25 51,16.5 51,18 51,24.089 cw(c53.199,24.089) 51.644,25.644 52,26 A1.6
RDI_P: A1.3 C17.2 | length 13.9
  Top Layer w0.4: A1.3@55.5,23 A1.3
  Bottom Layer w0.3: C17.2 49.355,14.155 ccw(c48.793,14.718) 49.588,14.718 49.588,14.903 cw(c49.935,14.903) 49.69,15.148 cw(c49.935,14.903) 49.935,15.25 50.5,15.25 ccw(c50.5,16.25) 51.5,16.25 51.5,18.207 51.5,21.75 cw(c52.845,21.75) 52.845,23.095 A1.3
RX: R4.1 VT1.3 XP1.1 | length 6.2
  Bottom Layer w0.5: XP1.1 R4.1 9.5,20.293 ccw(c7.793,20.293) 9,21.5 cw(c9.724,22.224) 8.7,22.224 VT1.3
RX_N: DD2.5 R23.1 | length 5.4
  Bottom Layer w0.3: DD2.5 42.265,15.75 ccw(c42.265,16.097) 42.51,15.852 ccw(c42.265,16.097) 42.612,16.097 42.612,16.282 cw(c43.407,16.282) 42.845,16.845 R23.1
RX_P: DD2.6 R22.1 | length 5.4
  Bottom Layer w0.3: DD2.6 42.265,15.25 cw(c42.265,14.903) 42.51,15.148 cw(c42.265,14.903) 42.612,14.903 42.612,14.718 ccw(c43.407,14.718) 42.845,14.155 R22.1
SPI1-MISO: DD1.22 DD2.34 | length 15.9
  Bottom Layer w0.3: DD1.22 25.25,29.102 ccw(c27.79,29.102) 25.994,27.306 27.2,26.1 cw(c26.476,25.376) 27.5,25.376 27.5,18 ccw(c28.75,18) 28.75,16.75 DD2.34
SPI1-MOSI: DD1.23 DD2.35 | length 16.8
  Top Layer w0.5: v1(26.25,22) v1(28.3,22)
  Bottom Layer w0.3: DD1.23 24.75,26.891 ccw(c27.29,26.891) 25.494,25.095 25.64,24.949 cw(c23.71,23.298) 26.25,23.298 v1(26.25,22) ; v1@28,21.976 28,18 ccw(c28.75,18) 28.75,17.25 DD2.35
SPI1-SCK: DD1.21 DD2.33 | length 16.3
  Top Layer w0.5: v1(26.7,25.4) v1(26.7,27.8)
  Bottom Layer w0.3: DD1.21 25.75,29.55 25.75,29.5 ccw(c27.25,29.5) 26.099,28.538 v1(26.7,27.8) ; v1(26.7,25.4) cw(c25.976,24.676) 27,24.676 27,24.3 27,18 ccw(c28.75,18) 28.75,16.25 DD2.33
SWCLK: DD1.49 R3.2 | length 2.5
  Bottom Layer w0.3: R3.2 20.15,41.9 cw(c20.15,41.8) DD1.49
SWDIO: DD1.46 R2.2 | length 5.8
  Top Layer w0.5: v1(16.5,38.75) v1(16.5,40.6)
  Bottom Layer w0.3: v1(16.5,38.75) DD1.46
  Bottom Layer w0.5: R2.2 15.2,41.9 cw(c15.2,40.6) v1(16.5,40.6)
TCT: A1.4 C19.1 R28.1 | length 8.9
  Top Layer w0.4: v1(50.7,27) 50.7,26.625 ccw(c52.96,26.625) A1.4
  Bottom Layer w0.4: C19.1 cw(c50.557,25.293) 50.557,27 v1(50.7,27) 50.094,27.606 cw(c51.89,29.402) 49.35,29.402 R28.1
TD_N: A1.2 R21.2 R27.1 | length 16.6
  Top Layer w0.3: v1@46.875,24.15 48.75,24.15 cw(c48.75,22) 50.9,22 50.9,21 ccw(c52,21) 52,19.9 52.574,19.9 ccw(c52.574,20.426) 52.946,20.054 53.564,20.673 ; A1.2 cw(c52.96,21.547) 53.156,21.744 53.6,21.3 cw(c53.359,21.059) 53.7,21.059 53.7,21 cw(c53.237,21) 53.565,20.673
  Bottom Layer w0.3: R21.2 R27.1 ; R21.2@45.255,25.245 cw(c44.693,24.682) 45.488,24.682 45.488,24.497 ccw(c45.835,24.497) 45.59,24.252 ccw(c45.835,24.497) 45.835,24.15 v1@46.875,24.15
  other v1: 46.875,24.4
TD_P: A1.1 R20.2 R24.1 | length 17
  Top Layer w0.3: v1@46.875,23.65 48.75,23.65 cw(c48.75,22) 50.4,22 50.4,21 ccw(c52,21) 52,19.4 52.575,19.4 ccw(c52.575,20.423) 53.298,19.7 53.616,20.017 cw(c54.915,18.718) 54.915,20.555 A1.1
  Bottom Layer w0.3: R24.1 R20.2 ; R20.2@45.255,22.555 ccw(c44.693,23.118) 45.488,23.118 45.488,23.303 cw(c45.835,23.303) 45.59,23.548 cw(c45.835,23.303) 45.835,23.65 v1@46.875,23.65
  other v1: 46.875,23.4
TX: R5.1 VT2.3 XP1.9 | length 6.3
  Bottom Layer w0.5: XP1.9 6.516,30.144 ccw(c8.312,31.94) 8.312,29.4 R5.1 9.5,29.207 cw(c7.793,29.207) 9,28 ccw(c9.724,27.276) 8.7,27.276 VT2.3
TX_N: DD2.1 R21.1 | length 10.9
  Bottom Layer w0.3: DD2.1 39.25,17.75 ccw(c39.25,18.5) 40,18.5 40,22.55 cw(c41.6,22.55) 41.6,24.15 42.365,24.15 ccw(c42.365,24.497) 42.61,24.252 ccw(c42.365,24.497) 42.712,24.497 42.712,24.682 cw(c43.507,24.682) 42.945,25.245 R21.1@43,25.3
TX_P: DD2.2 R20.1 | length 10.9
  Bottom Layer w0.3: DD2.2 39.25,17.25 ccw(c39.25,18.5) 40.5,18.5 40.5,22.55 cw(c41.6,22.55) 41.6,23.65 42.365,23.65 cw(c42.365,23.303) 42.61,23.548 cw(c42.365,23.303) 42.712,23.303 42.712,23.118 ccw(c43.507,23.118) 42.945,22.555 R20.1@43,22.5
USART1-RX: DD1.43 R7.1 VT2.2 | length 17.3
  Bottom Layer w0.3: VT2.2 11.85,25.55 ccw(c11.85,25.9) 11.883,25.552 ccw(c11.85,25.9) 12.2,25.9 cw(c12.5,25.9) 12.5,26.2 R7.1 14.2,26.2 ccw(c14.2,27) 15,27 15,35.75 cw(c16.5,35.75) 16.5,37.25 DD1.43
USART1-TX: DD1.42 R6.1 VT1.2 | length 21.9
  Bottom Layer w0.3: VT1.2 11.941,22.05 cw(c11.941,21.697) 11.948,22.05 cw(c11.941,21.697) 12.242,21.881 ; 12.294,21.697 ccw(c11.941,21.697) 12.242,21.881 ; DD1.42 16.5,36.75 ccw(c16.5,35.75) 15.5,35.75 15.5,22.5 cw(c14.4,22.5) 14.4,21.4 R6.1 12.77,21.4 cw(c12.77,21.93) 12.242,21.881
W5500-CS: DD1.25 DD2.32 R16.1 | length 17.6
  Bottom Layer w0.3: R16.1@23.75,22.7 DD1.25 ; R16.1 cw(c23.8,21.334) 24.483,22.017 26,20.5 cw(c24.793,19.293) 26.5,19.293 26.5,17.85 ccw(c28.6,17.85) 28.6,15.75 DD2.32
W5500-INT: DD1.20 DD2.36 R17.1 | length 14.2
  Bottom Layer w0.3: DD1.20@26.25,30.199 26.25,29.5 ccw(c27.25,29.5) 27.25,28.5 cw(c27.25,26.85) 27.254,28.5 cw(c27.25,26.85) 28.9,26.85 R17.1 28.9,23.266 ccw(c30.266,23.266) 29.124,22.516 cw(c27.734,21.126) 29.34,22.261 cw(c27.734,21.126) 29.7,21.126 DD2.36
W5500-RST: DD1.24 DD2.37 R18.1 | length 16.9
  Top Layer w0.5: v1(25.4,23) v1(30,23)
  Bottom Layer w0.3: DD1.24 24.25,25.786 ccw(c25.786,25.786) 24.7,24.7 cw(c23.01,23.01) 25.4,23.01 v1(25.4,23) ; v1(30,23) 30.193,23 cw(c30.193,21.293) 31.4,22.5 ccw(c31.762,22.138) 31.25,22.138 DD2.37
XI: BQ2.1 C9.2 DD2.30 R15.2 | length 12
  Bottom Layer w0.3: R15.2 19.66,13.9 cw(c19.66,12.56) BQ2.1 21.546,13.106 cw(c23.342,11.31) C9.2@23.342,13.85 ; C9.2 23.931,13.85 ccw(c23.931,16.069) 25.5,14.5 cw(c26.104,13.896) 26.104,14.75 DD2.30
XO: BQ2.2 C10.2 DD2.31 R15.1 | length 12
  Bottom Layer w0.3: R15.1 19.66,16.1 ccw(c19.66,17.44) BQ2.2 21.546,16.894 ccw(c23.342,18.69) C10.2@23.342,16.15 ; C10.2 23.931,16.15 cw(c23.931,13.931) 25.5,15.5 ccw(c26.104,16.104) 26.104,15.25 DD2.31
pads on no net: A1.0 A1.7 DD1.2 DD1.3 DD1.4 DD1.8 DD1.9 DD1.10 DD1.11 DD1.14 DD1.15 DD1.16 DD1.17 DD1.26 DD1.27 DD1.29 DD1.30 DD1.33 DD1.34 DD1.35 DD1.36 DD1.37 DD1.38 DD1.39 DD1.40 DD1.41 DD1.44 DD1.45 DD1.50 DD1.51 DD1.52 DD1.53 DD1.54 DD1.55 DD1.56 DD1.57 DD1.58 DD1.59 DD2.7 DD2.12 DD2.13 DD2.18 DD2.23 DD2.24 DD2.26 DD2.38 DD2.39 DD2.40 DD2.41 DD2.42 DD2.46 DD2.47 XP1.3 XP1.4 XP1.5 XP1.7

## Polygon pours and split planes (outlines as drawn)
GNDA on Bottom Layer "GNDA_L02_P006" (solid, remove dead copper, pour order 6): 68,34.5 46.2,34.5 35.5,23.8 35.5,16.8 28.7,10 25,10 25,2 68,2
GND on Bottom Layer "GND_L02_P004" (solid, remove dead copper, pour order 4): 35,17 35,24 46,35 68,35 68,48 2,48 2,21 14.5,21 14.5,37.5 18,37.5 18,25 23.5,25 23.5,20 18,20 18,10.5 28.5,10.5
3.3V on Bottom Layer "3.3V_L02_P001" (solid, remove dead copper, pour order 1): 17.5,24.4 22.6,24.4 23,24 23,20.55 17.5,20.55 17.5,10 24.5,10 24.5,2 10,2 10,8.5 12.5,8.5 12.5,12.5 8.5,12.5 8.5,14.5 12.5,14.5 12.5,17.5 15,17.5 15,36.5 17.5,36.5
5V on Bottom Layer "5V_L02_P000" (solid, remove dead copper, pour order 0): 2,20.5 2,15 12,15 12,19 5.5,19 5.5,20.5
GND on Bottom Layer "GND_L02_P002" (solid, remove dead copper, pour order 2): 12,12 12,9 2,9 2,14.5 8,14.5 8,12
GND on Top Layer "GND_L01_P003" (solid, remove dead copper, pour order 3): 68,48 2,48 2,2 24.5,2 24.5,10.5 28.5,10.5 35,17 35,24 46,35 68,35
GNDA on Top Layer "GNDA_L01_P005" (solid, remove dead copper, pour order 5): 68,34.5 46.2,34.5 35.5,23.8 35.5,16.8 28.7,10 25,10 25,2 68,2

## Keep-outs
Top Layer:
  circle w0.3: c5,5 r5
  circle w0.3: c5,45 r5
  circle w0.3: c65,5 r5
  circle w0.3: c65,45 r5
Bottom Layer:
  circle w0.3: c5,5 r5
  circle w0.3: c5,45 r5
  circle w0.3: c65,5 r5
  circle w0.3: c65,45 r5

## Silkscreen, mask and mechanical layers (free items; w line width, h text height)
Top Overlay:
  drawing of 10 lines, arcs and shapes, not listed
  text "SWD" at 21.3,45 h2.5
  text "TX" at 48.8,44.7 h2.5
  text "RX" at 48.8,40.7 h2.5
  text "+5V" at 0.3,37.2 h2.5
  text "+3.3V" at 45.4,36.7 h2.5
  text "ЗАВ. №:" at 16.9,35.2 h2.5
  text "ETHERNET" at 56.7,13.1 h2.5
  text "UART" at 0.3,11.8 h2.5
  text "АСТА.758723.038 V1" at 35.183,8.567 h2.5
  text "ПЛАТА UART-ETHERNET" at 10,0.5 h2.5
Bottom Courtyard:
  the board outline again, w0.1
Top Assembly (Mech13):
  circle w0.1: c5,5 r1.7
  circle w0.1: c5,45 r1.7
  circle w0.1: c65,5 r1.7
  circle w0.1: c65,45 r1.7
  lines w0.1: 2.5,5 7.5,5 ; 2.5,45 7.5,45 ; 5,2.5 5,7.5 ; 5,42.5 5,47.5 ; 62.5,5 67.5,5 ; 62.5,45 67.5,45 ; 65,2.5 65,7.5 ; 65,42.5 65,47.5 ; 0,0 0,50 70,50 70,0 0,0
Bottom Assembly (Mech14):
  circle w0.1: c5,5 r1.7
  circle w0.1: c5,45 r1.7
  circle w0.1: c65,5 r1.7
  circle w0.1: c65,45 r1.7
  lines w0.1: 2.5,5 7.5,5 ; 2.5,45 7.5,45 ; 5,2.5 5,7.5 ; 5,42.5 5,47.5 ; 62.5,5 67.5,5 ; 62.5,45 67.5,45 ; 65,2.5 65,7.5 ; 65,42.5 65,47.5 ; 0,0 0,50 70,50 70,0 0,0